# EAGLE board caretaker-remotecontrol (EAGLE 5.10)
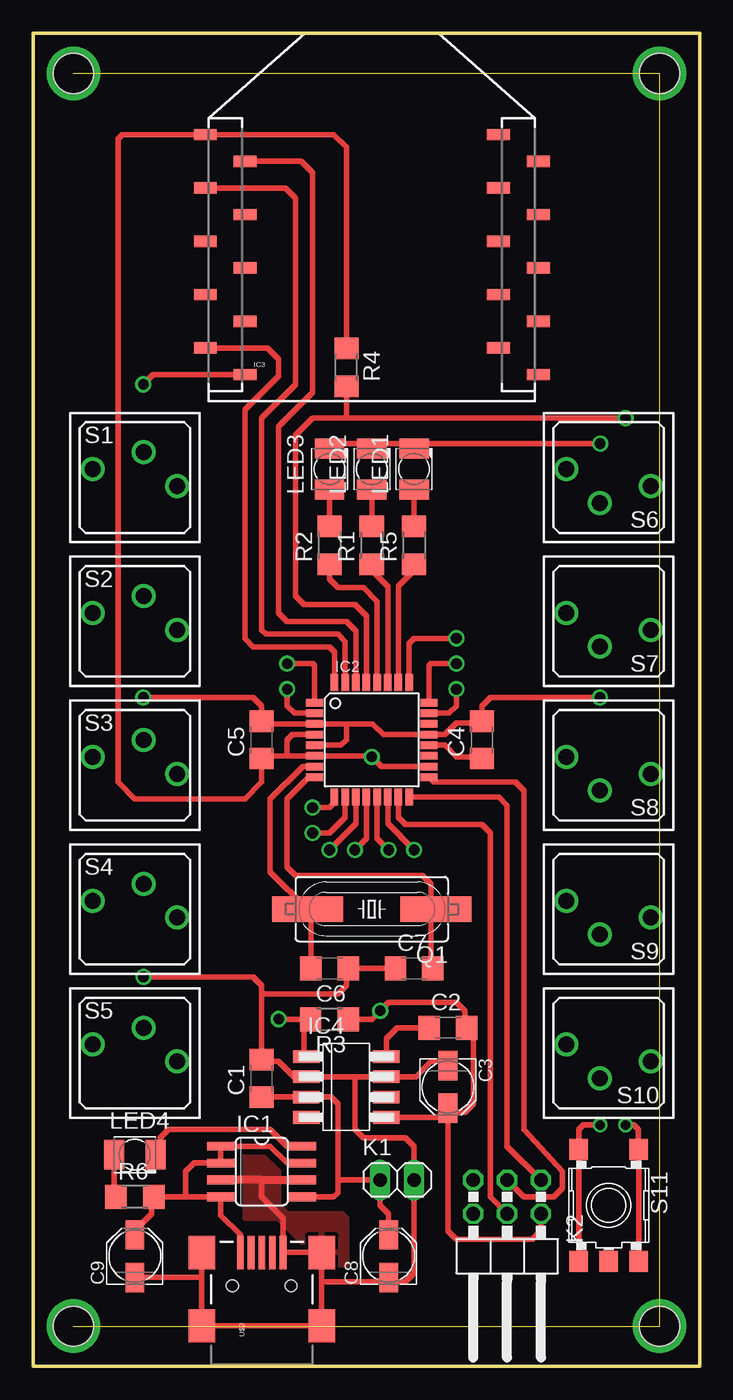
[diagram p0: board, top side]
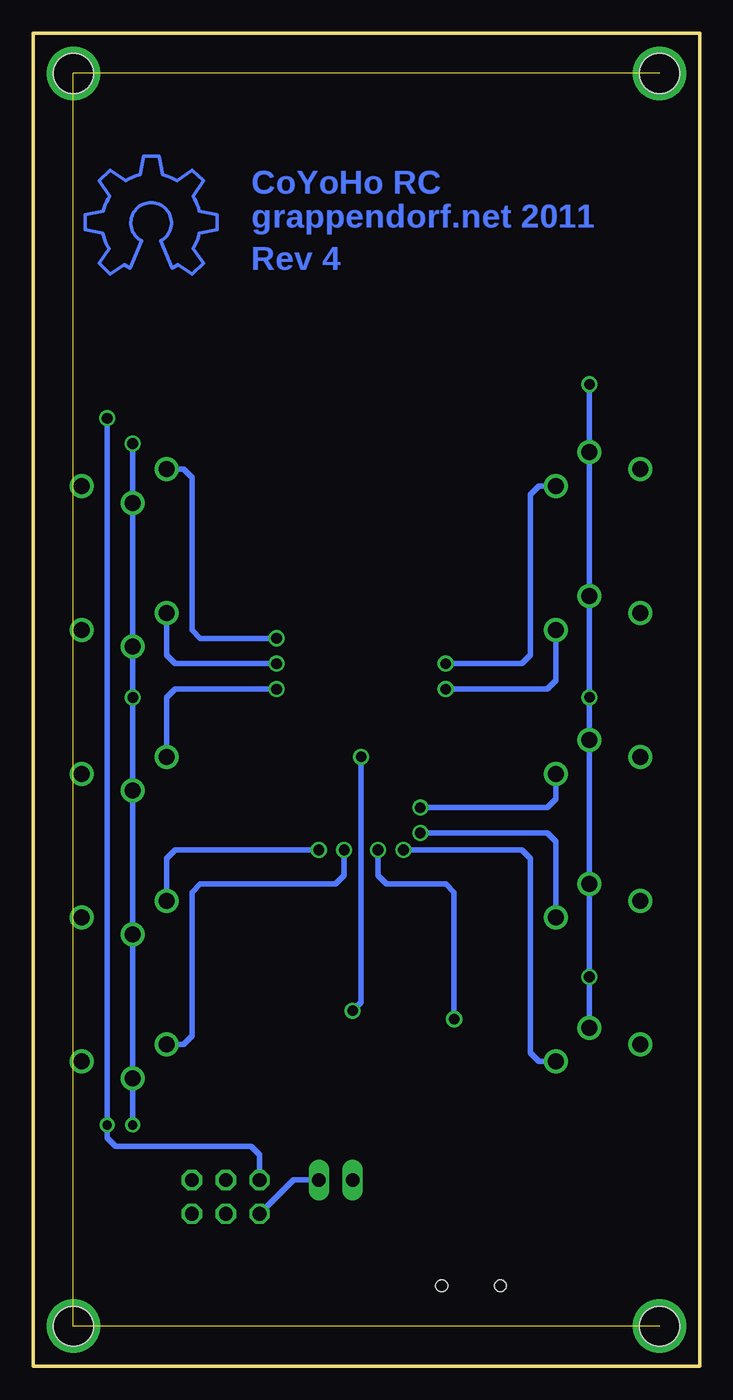
[diagram p1: board, bottom side, seen from below]

Size 50 x 100 mm. Coordinates in mm from the lower left corner, seen from the top.
Outline: 0,0 50,0 50,100 0,100 0,0
Copper layers (1*16): Top 0.035mm / dielectric 1.5mm / Bottom 0.035mm
Design rules "default": minimum track width 10mil, minimum drill 24mil, track to track 8mil, track to pad 8mil, pad to pad 8mil, via to via 8mil, smd to smd 8mil, copper to edge 40mil, drill to drill 8mil, minimum pad ring 10mil, minimum via ring 8mil, stop-mask expansion 4mil, vias tented up to drill 0mil, thermal gap 10mil
Holes 3 mm at 3,3 47,3 47,97 3,97

## Footprints (pad centres in the part's own frame; a part is rotated, then mirrored left to right if it is on the bottom)
C1206 = smd 1.6 x 1.8: 1 -1.4,0; 2 1.4,0
PANASONIC_B = smd 2.2 x 1.4: + 1.6,0; - -1.6,0
SO08 = smd 0.66 x 2.032: 1 -1.905,-3.073; 2 -0.635,-3.073; 3 0.635,-3.073; 4 1.905,-3.073; 5 1.905,3.073; 6 0.635,3.073; 7 -0.635,3.073; 8 -1.905,3.073
TQFP32-08 = smd 1.27 x 0.559: 1 -4.293,2.8; 2 -4.293,2; 3 -4.293,1.2; 4 -4.293,0.4; 5 -4.293,-0.4; 6 -4.293,-1.2; 7 -4.293,-2; 8 -4.293,-2.8; 17 4.293,-2.8; 18 4.293,-2; 19 4.293,-1.2; 20 4.293,-0.4; 21 4.293,0.4; 22 4.293,1.2; 23 4.293,2; 24 4.293,2.8 | smd 0.559 x 1.27: 9 -2.8,-4.293; 10 -2,-4.293; 11 -1.2,-4.293; 12 -0.4,-4.293; 13 0.4,-4.293; 14 1.2,-4.293; 15 2,-4.293; 16 2.8,-4.293; 25 2.8,4.293; 26 2,4.293; 27 1.2,4.293; 28 0.4,4.293; 29 -0.4,4.293; 30 -1.2,4.293; 31 -2,4.293; 32 -2.8,4.293
XBEE-SMD = smd 1.7 x 0.85: 1 -12.5,20; 2 -9.5,18; 3 -12.5,16; 4 -9.5,14; 5 -12.5,12; 6 -9.5,10; 7 -12.5,8; 8 -9.5,6; 9 -12.5,4; 10 -9.5,2; 11 12.5,2; 12 9.5,4; 13 12.5,6; 14 9.5,8; 15 12.5,10; 16 9.5,12; 17 12.5,14; 18 9.5,16; 19 12.5,18; 20 9.5,20
SM8 = smd 0.95 x 2: 1 -2.28,-3; 2 -0.76,-3; 3 0.76,-3; 4 2.28,-3; 5 2.28,3; 6 0.76,3; 7 -0.76,3; 8 -2.28,3
1X02 = drill 1.016 long: 1 -1.27,0; 2 1.27,0
2X03/90 = drill 1.016 octagon: 1 -2.54,-6.35; 2 -2.54,-3.81; 3 0,-6.35; 4 0,-3.81; 5 2.54,-6.35; 6 2.54,-3.81
KA-3528ASYC = smd 1.5 x 2.2: A -1.55,0; C 1.55,0
HC49UP = smd 5.334 x 1.93: 1 -4.826,0; 2 4.826,0
R1206 = smd 1.6 x 1.803: 1 -1.422,0; 2 1.422,0
PBS-18B = drill 1.2 round: A 3.175,-0.635; A1 -3.175,0.635; B 0.65,1.9
SKHMPXE010 = smd 1.6 x 1.4: 1 -4.2,2.25; 2 4.2,2.25; 3 -4.2,-2.25; 4 4.2,-2.25; 5 4.2,0
USB-MINIB = smd 2.5 x 0.5: D+ 2.5,0; D- 2.5,0.8; GND 2.5,-1.6; ID 2.5,-0.8; VBUS 2.5,1.6 | smd 2.5 x 2: MTN1 -3,4.5; MTN2 2.5,4.5; MTN3 -3,-4.5; MTN4 2.5,-4.5 | hole 0.9: 0,2.2; 0,-2.2

## Placement (x,y rotation side)
C1  100n  [C1206]  17.14,21.59 90 top
C2  10p  [C1206]  31.11,25.4 0 top
C3  1u/16V  [PANASONIC_B]  31.11,20.95 270 top
C4  100n  [C1206]  33.66,46.99 90 top
C5  100n  [C1206]  17.14,46.99 90 top
C6  22p  [C1206]  22.23,29.84 180 top
C7  22p  [C1206]  28.57,29.84 0 top
C8  10u/16V  [PANASONIC_B]  26.67,8.26 90 top
C9  10u/16V  [PANASONIC_B]  7.62,8.26 90 top
IC1  MAX1811N  [SO08]  17.14,14.61 270 top
IC2  ATMEGA168  [TQFP32-08]  25.4,46.99 0 top
IC3  XBee Series 2  [XBEE-SMD]  25.4,72.39 0 top
IC4  ZLDO330  [SM8]  23.5,20.95 270 top
K1  BAT  [1X02]  27.3,13.97 0 top
K2  ISP  [2X03/90]  35.56,7.62 180 top
LED1  [KA-3528ASYC]  28.57,67.31 90 top
LED2  [KA-3528ASYC]  25.4,67.31 90 top
LED3  [KA-3528ASYC]  22.23,67.31 90 top
LED4  [KA-3528ASYC]  7.62,15.88 0 top
LOGO1  OSHW_LOGO_10MILX0350-NT-BOTTOM  [OSHW_10X350_NOTEXT_BOTTOM]  41.27,85.72 0 top
Q1  16MHz  [HC49UP]  25.4,34.29 180 top
R1  180  [R1206]  25.4,61.59 90 top
R2  180  [R1206]  22.23,61.59 90 top
R3  100k  [R1206]  22.23,26.04 180 top
R4  10k  [R1206]  23.5,74.93 270 top
R5  180  [R1206]  28.57,61.59 90 top
R6  1k  [R1206]  7.62,12.7 0 top
S1  PBS-18B  [PBS-18B]  7.62,66.67 0 top
S2  PBS-18B  [PBS-18B]  7.62,55.88 0 top
S3  PBS-18B  [PBS-18B]  7.62,45.09 0 top
S4  PBS-18B  [PBS-18B]  7.62,34.29 0 top
S5  PBS-18B  [PBS-18B]  7.62,23.5 0 top
S6  PBS-18B  [PBS-18B]  43.18,66.67 180 top
S7  PBS-18B  [PBS-18B]  43.18,55.88 180 top
S8  PBS-18B  [PBS-18B]  43.18,45.09 180 top
S9  PBS-18B  [PBS-18B]  43.18,34.29 180 top
S10  PBS-18B  [PBS-18B]  43.18,23.5 180 top
S11  SKHMPSE010  [SKHMPXE010]  43.18,12.06 270 top
U$2  USB-MINIB-5PIN  [USB-MINIB]  17.14,6.03 90 top

## Library data of the parts
C1-C9 R1-R6 = rcl
IC1 IC3 IC4 S1-S10 = grapelabs
IC2 = atmega8
K1 K2 = pinhead
LED1-LED4 = led
LOGO1 = OSHW
Q1 = crystal
S11 = switch
U$2 = SparkFun

## Nets
+3V3: C2.2 C3.+ C5.1 IC2.4 IC2.6 IC2.18 IC3.1 IC4.5 K2.2 R3.1 R4.1
BAT: C1.1 C8.+ IC1.5 IC4.3 K1.1
GND: C1.2 C3.- C4.2 C5.2 C6.1 C7.1 C8.- C9.- IC1.3 IC1.6 IC2.3 IC2.5 IC2.21 IC3.10 IC4.2 IC4.7 K1.2 K2.6 LED1.C LED2.C LED3.C S1.B S2.B S3.B S4.B S5.B S6.B S7.B S8.B S9.B S10.B S11.3 S11.4 U$2.GND U$2.MTN1 U$2.MTN2 U$2.MTN3 U$2.MTN4
LED1: IC2.26 R5.1
LED2: IC2.27 R1.1
LED3: IC2.28 R2.1
LOWBAT: IC2.12 IC4.1 R3.2
MISO: IC2.16 K2.1
MOSI: IC2.15 K2.4
N$1: C9.+ IC1.1 IC1.2 IC1.4 IC1.7 R6.2 U$2.VBUS
N$2: C4.1 IC2.20
N$3: C6.2 IC2.7 Q1.2
N$4: C7.2 IC2.8 Q1.1
N$6: LED2.A R1.2
N$7: LED3.A R2.2
N$9: LED4.A R6.1
N$10: LED1.A R5.2
N$12: IC1.8 LED4.C
N$15: C2.1 IC4.8
RESET: IC2.29 K2.5 R4.2 S11.1 S11.2
RXD: IC2.30 IC3.2
SCK: IC2.17 K2.3
SW1: IC2.1 S1.A
SW2: IC2.2 S2.A
SW3: IC2.9 S3.A
SW4: IC2.10 S4.A
SW5: IC2.11 S5.A
SW6: IC2.25 S6.A
SW7: IC2.24 S7.A
SW8: IC2.23 S8.A
SW9: IC2.14 S9.A
SW10: IC2.13 S10.A
TXD: IC2.31 IC3.3
XBEESLEEP: IC2.32 IC3.9

## Tracks (layer width: path | path; a pad name or v marks a point on that pad's centre or on a via)
+3V3  (via drill 0.8)
  Top 0.406: IC2.18 26.13,44.99 v25.4,45.72 25.33,45.79 IC2.6 19.05,45.79 | C5.1 17.34,45.79 17.21,45.79 17.14,45.72 17.78,45.72 17.85,45.79 19.05,45.79 | IC2.4 19.45,47.39 19.05,46.99 19.05,45.79 | C5.1 17.02,45.72 | R4.1 23.5,91.44 22.55,92.39 IC3.1 6.67,92.39 6.35,92.08 6.35,43.81 7.62,42.55 15.88,42.55 17.14,43.81 C5.1 | R3.1 25.4,26.04 v26.04,26.67 26.67,27.3 31.75,27.3 32.38,26.67 32.38,25.53 C2.2 32.52,25.27 33.02,24.77 33.02,19.68 32.38,19.05 31.75,19.05 31.11,18.41 | 31.11,18.41 31.11,10.16 31.75,9.53 37.47,9.53 38.1,10.16 K2.2 | 31.11,18.41 C3.+ | IC4.5 30.86,18.68 31.11,18.41
  Bottom 0.406: v25.4,45.72 25.4,27.3 v26.04,26.67
BAT
  Top 0.406: C1.1 IC4.3 22.35,20.2 22.86,19.68 22.86,13.97 | 22.86,13.97 K1.1 26.04,12.06 26.67,11.43 C8.+ | IC1.5 22.54,12.7 22.86,13.02 22.86,13.97
GND  (via drill 0.7, 0.8)
  Top 0.406: 23.5,48.19 IC2.3 17.34,48.19 C5.2 | 23.5,48.19 25.47,48.19 26.27,47.39 IC2.21 30.88,47.39 31.75,48.26 33.52,48.26 C4.2 | IC2.5 23.09,46.59 23.5,46.99 23.5,48.19 | C7.1 C6.1 23.5,29.08 23.5,28.57 22.86,27.94 17.14,27.94 | IC3.10 8.98,74.39 v8.26,73.66 | v42.55,69.22 28.93,69.22 | 28.93,69.22 LED1.C | 17.14,27.94 C1.2 17.27,22.86 18.41,22.86 19.56,21.71 IC4.2 24.13,21.71 | C4.2 33.66,48.26 | C3.- 30.81,22.86 29.84,22.86 28.7,21.71 IC4.7 24.13,21.71 | 28.93,69.22 25.4,69.22 LED2.C 25.05,69.22 22.23,69.22 LED3.C | v8.26,50.18 8.26,50.16 16.51,50.16 17.14,49.53 C5.2 | C5.2 17.02,48.26 | v42.53,50.16 34.29,50.16 33.66,49.53 C4.2 | v8.27,29.21 16.51,29.21 17.14,28.57 17.14,27.94 | 17.14,13.97 17.14,12.7 18.75,11.1 U$2.GND U$2.MTN4 21.64,6.35 | 24.13,21.71 24.13,17.78 24.77,17.14 27.94,17.14 28.57,16.51 K1.2 28.57,6.99 27.94,6.35 26.34,6.35 C8.- 25.73,6.35 21.64,6.35 | 12.64,6.67 U$2.MTN1 U$2.MTN3 21.64,6.35 | 12.64,6.67 U$2.MTN2 | 12.64,6.67 8.27,6.67 C9.- | S11.3 41.27,16.29 | S11.3 S11.4 | v42.55,18.1 41.27,18.1 40.96,17.78 40.96,16.29 S11.3
  Top 0.61: IC1.3 17.14,13.97 IC1.6
  Bottom 0.406: v42.55,69.22 42.55,63.52 S6.B S7.B v42.53,50.16 S8.B S9.B S10.B 42.55,21.58 v42.55,18.1 | v8.26,73.66 8.27,71.74 S1.B S2.B v8.26,50.18 S3.B S4.B v8.27,29.21 S5.B | K1.2 30.48,13.97 K2.6
  pour Top (isolate 0.406): 15.88,15.88 15.88,11.11 18.41,11.11 18.41,14.61 17.14,15.88
  pour Top: 18.41,11.11 21.91,7.62 23.5,7.62 23.5,11.11 23.18,11.43 19.05,11.43 18.41,12.06
LED1
  Top 0.406: IC2.26 27.4,58.52 28.57,59.69 R5.1
LED2
  Top 0.406: IC2.27 26.6,58.49 25.4,59.69 R1.1
LED3
  Top 0.406: IC2.28 25.8,57.38 24.77,58.42 22.86,58.42 22.23,59.05 R2.1
LOWBAT  (via drill 0.8)
  Top 0.406: IC2.12 25,39.6 v24.13,38.73 | IC4.1 20.32,23.23 20.32,25.4 20.8,25.4 R3.2 v18.41,26.04
  Bottom 0.406: v24.13,38.73 24.13,36.83 23.5,36.2 19.05,36.2 18.41,35.56 v18.41,26.04
MISO
  Top 0.406: 28.2,42.28 IC2.16 34.92,42.7 35.56,42.06 35.56,16.51 K2.1
MOSI
  Top 0.406: IC2.15 27.4,41.18 27.94,40.64 33.66,40.64 34.29,40.01 34.29,12.7 K2.4
N$1
  Top 0.406: 11.43,12.7 11.43,14.61 12.06,15.24 IC1.2 IC1.1 17.78,16.51 19.05,15.24 IC1.7 | 11.43,12.7 IC1.4 14.07,11.33 15.56,9.84 15.56,8.54 U$2.VBUS | 11.43,12.7 R6.2 8.89,12.55 8.89,11.43 8.26,10.79 C9.+
N$2
  Top 0.406: IC2.20 30.88,46.59 31.75,45.72 33.52,45.72 C4.1
N$3
  Top 0.406: Q1.2 19.05,33.66 | IC2.7 20.23,44.99 17.78,42.55 17.78,37.08 Q1.2 | C6.2 20.82,34.04 Q1.2
N$4
  Top 0.406: IC2.8 20.7,44.19 19.05,42.55 19.05,37.47 19.68,36.83 29.21,36.83 29.84,36.2 29.84,34.67 Q1.1 29.84,34.04 29.84,29.98 C7.2
N$5  (via drill 3)
  other vias: 3,97
N$6
  Top 0.406: R1.2 LED2.A
N$7
  Top 0.406: R2.2 LED3.A
N$8  (via drill 3)
  other vias: 47,97
N$9
  Top 0.406: LED4.A 6.07,12.83 R6.1
N$10
  Top 0.406: R5.2 LED1.A
N$11  (via drill 3)
  other vias: 47,3
N$12
  Top 0.406: IC1.8 19.05,16.51 17.78,17.78 10.16,17.78 9.53,17.14 9.53,16.23 LED4.C
N$13  (via drill 3)
  other vias: 3,3
N$14  (via drill 0.5)  (3 unrouted)
  other vias: 3,3 3,97 47,3 47,97
N$15
  Top 0.406: IC4.8 26.5,24.59 27.3,25.4 C2.1
RESET  (via drill 0.7, 0.8)
  Top 0.406: IC2.29 25,56.28 24.13,57.15 20.32,57.15 19.68,57.78 19.68,69.85 20.95,71.12 23.5,71.12 | v44.45,71.12 23.5,71.12 | 23.5,71.12 R4.2 | S11.1 45.72,16.29 | S11.1 S11.2 | v44.45,18.1 45.09,18.1 45.4,17.78 45.4,16.29 S11.1
  Bottom 0.406: v44.45,71.12 v44.45,18.1 44.45,17.14 43.81,16.51 33.66,16.51 33.02,15.88 K2.5
RXD
  Top 0.406: IC3.2 20.1,90.39 20.95,89.53 20.95,73.03 18.41,70.48 18.41,56.52 19.05,55.88 23.5,55.88 24.2,55.17 IC2.30
SCK
  Top 0.406: IC2.17 30.07,43.81 36.2,43.81 36.83,43.18 36.83,17.78 39.69,14.61 39.69,13.34 39.05,12.7 36.83,12.7 K2.3
SW1  (via drill 0.8)
  Top 0.406: IC2.1 21.11,52.55 20.95,52.7 v19.05,52.7
  Bottom 0.406: v19.05,52.7 13.34,52.7 12.7,53.34 12.7,65.41 12.06,66.04 S1.A
SW2  (via drill 0.8)
  Top 0.406: IC2.2 19.59,48.99 19.05,49.53 v19.05,50.8
  Bottom 0.406: v19.05,50.8 11.43,50.8 10.79,51.44 S2.A
SW3  (via drill 0.8)
  Top 0.406: IC2.9 22.6,42.28 22.23,41.91 v20.95,41.91
  Bottom 0.406: v20.95,41.91 11.43,41.91 10.79,42.55 S3.A
SW4  (via drill 0.8)
  Top 0.406: IC2.10 23.4,41.18 22.23,40.01 v20.95,40.01
  Bottom 0.406: v20.95,40.01 11.43,40.01 10.79,39.37 S4.A
SW5  (via drill 0.8)
  Top 0.406: IC2.11 24.2,40.71 v22.23,38.73
  Bottom 0.406: v22.23,38.73 13.34,38.73 12.7,38.1 12.7,23.5 12.06,22.86 S5.A
SW6  (via drill 0.8)
  Top 0.406: IC2.25 28.2,54.23 28.57,54.61 v31.75,54.61
  Bottom 0.406: v31.75,54.61 37.47,54.61 38.1,55.24 38.1,66.67 38.73,67.31 S6.A
SW7  (via drill 0.8)
  Top 0.406: IC2.24 29.69,52.55 29.84,52.7 v31.75,52.7
  Bottom 0.406: v31.75,52.7 39.37,52.7 40.01,53.34 S7.A
SW8  (via drill 0.8)
  Top 0.406: IC2.23 31.21,48.99 31.75,49.53 v31.75,50.8
  Bottom 0.406: v31.75,50.8 39.37,50.8 40.01,50.16 S8.A
SW9  (via drill 0.8)
  Top 0.406: IC2.14 26.6,40.71 v28.57,38.73
  Bottom 0.406: v28.57,38.73 39.37,38.73 40.01,38.1 S9.A
SW10  (via drill 0.8)
  Top 0.406: IC2.13 25.8,39.6 v26.67,38.73
  Bottom 0.406: v26.67,38.73 26.67,36.83 27.3,36.2 37.47,36.2 38.1,35.56 38.1,24.77 38.73,24.13 S10.A
TXD
  Top 0.406: IC3.3 18.93,88.39 19.68,87.63 19.68,73.66 17.14,71.12 17.14,55.24 17.46,54.93 22.86,54.93 23.4,54.39 IC2.31
XBEESLEEP
  Top 0.406: IC3.9 17.59,76.39 18.41,75.56 18.41,74.3 15.88,71.75 15.88,54.61 16.51,53.98 22.23,53.98 22.6,53.6 IC2.32

## Text on the board
Bottom: CoYoHo RC | grappendorf.net 2011 | Rev 4